# Altium PCB Pulser_10-2023.PcbDoc (part 1 of 2)
Units mm, origin at the board's own origin, x right, y up, seen from the top; angles counter-clockwise.
Board outline 57.93 x 43.58 mm, 4 copper layers (Top Layer, Int1 (GND), Int2 (Power), Bottom Layer), stack 1.56 mm thick; 123 components, 91 nets, 416 pads, 251 vias.
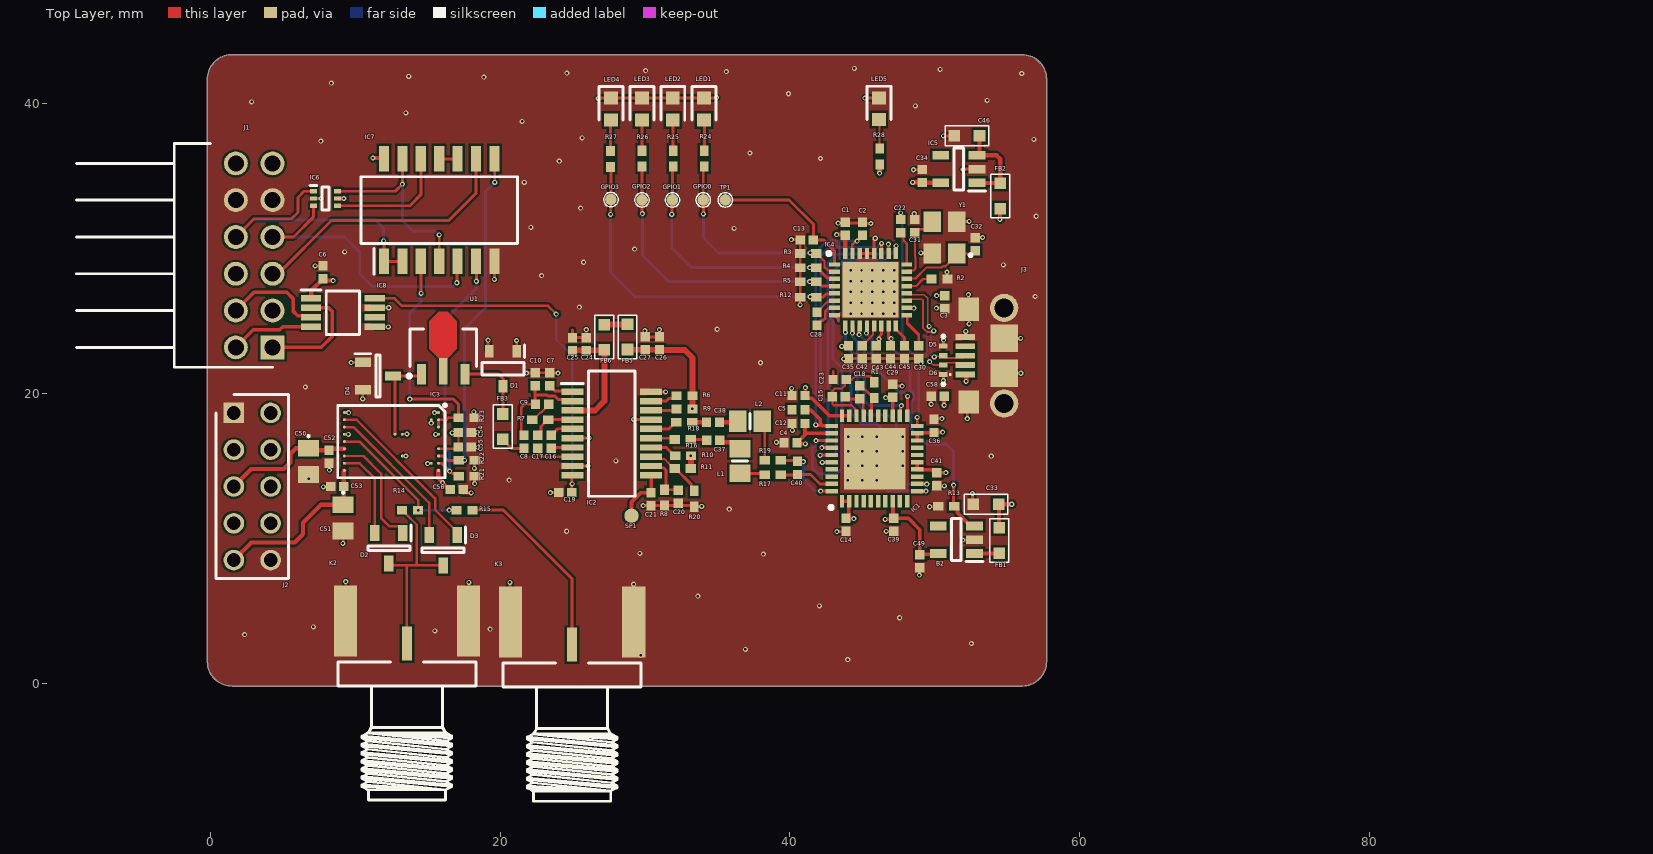
[diagram p0: Top Layer view]
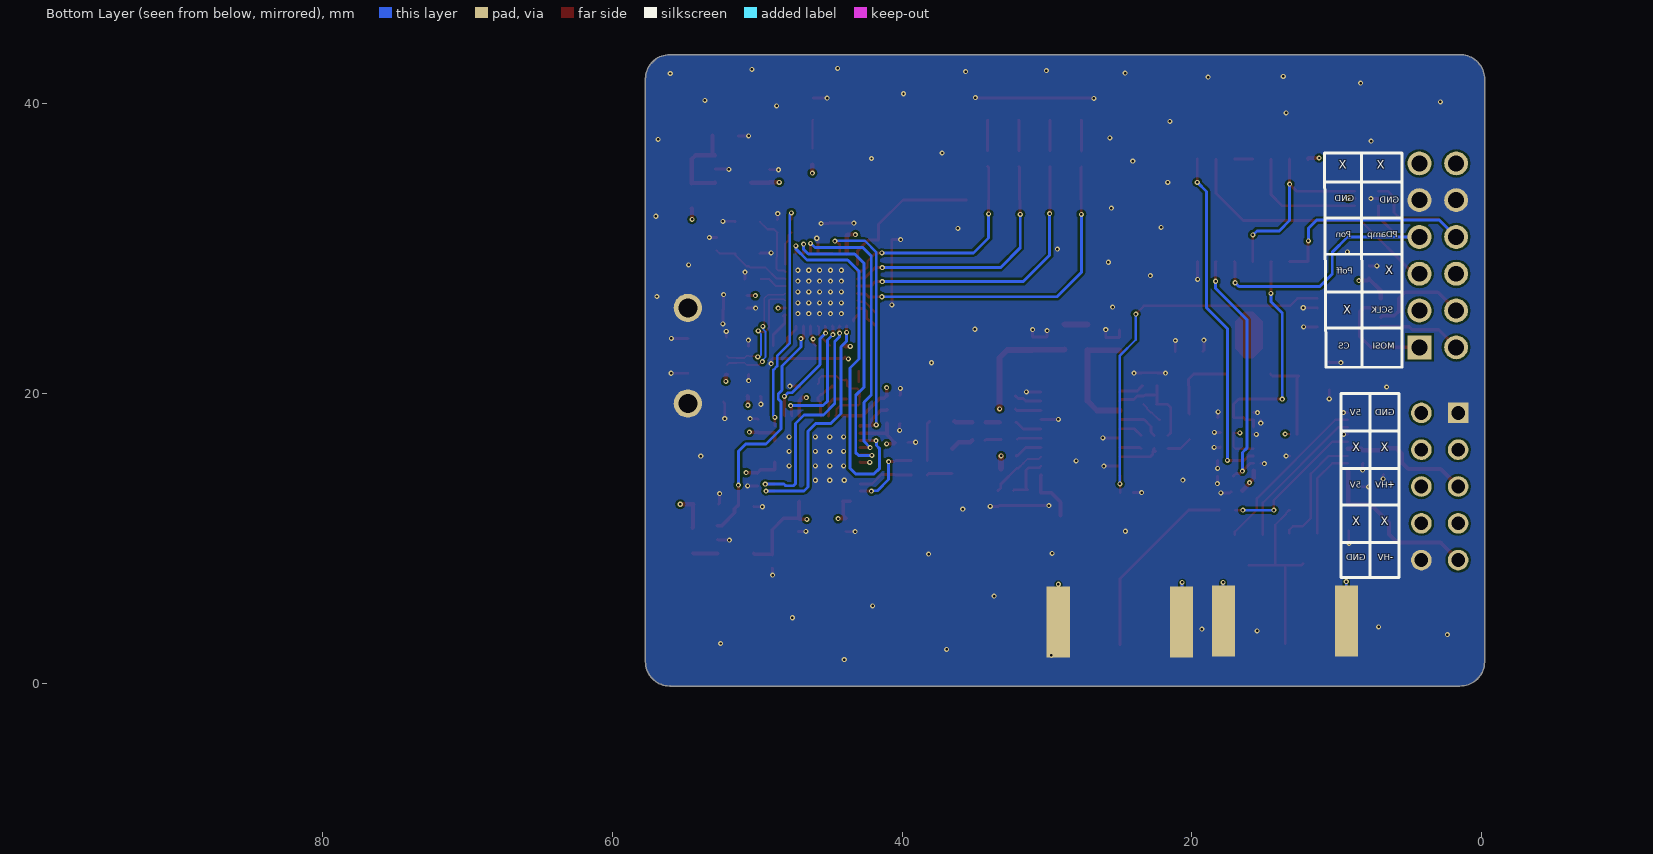
[diagram p1: Bottom Layer view, seen from below]
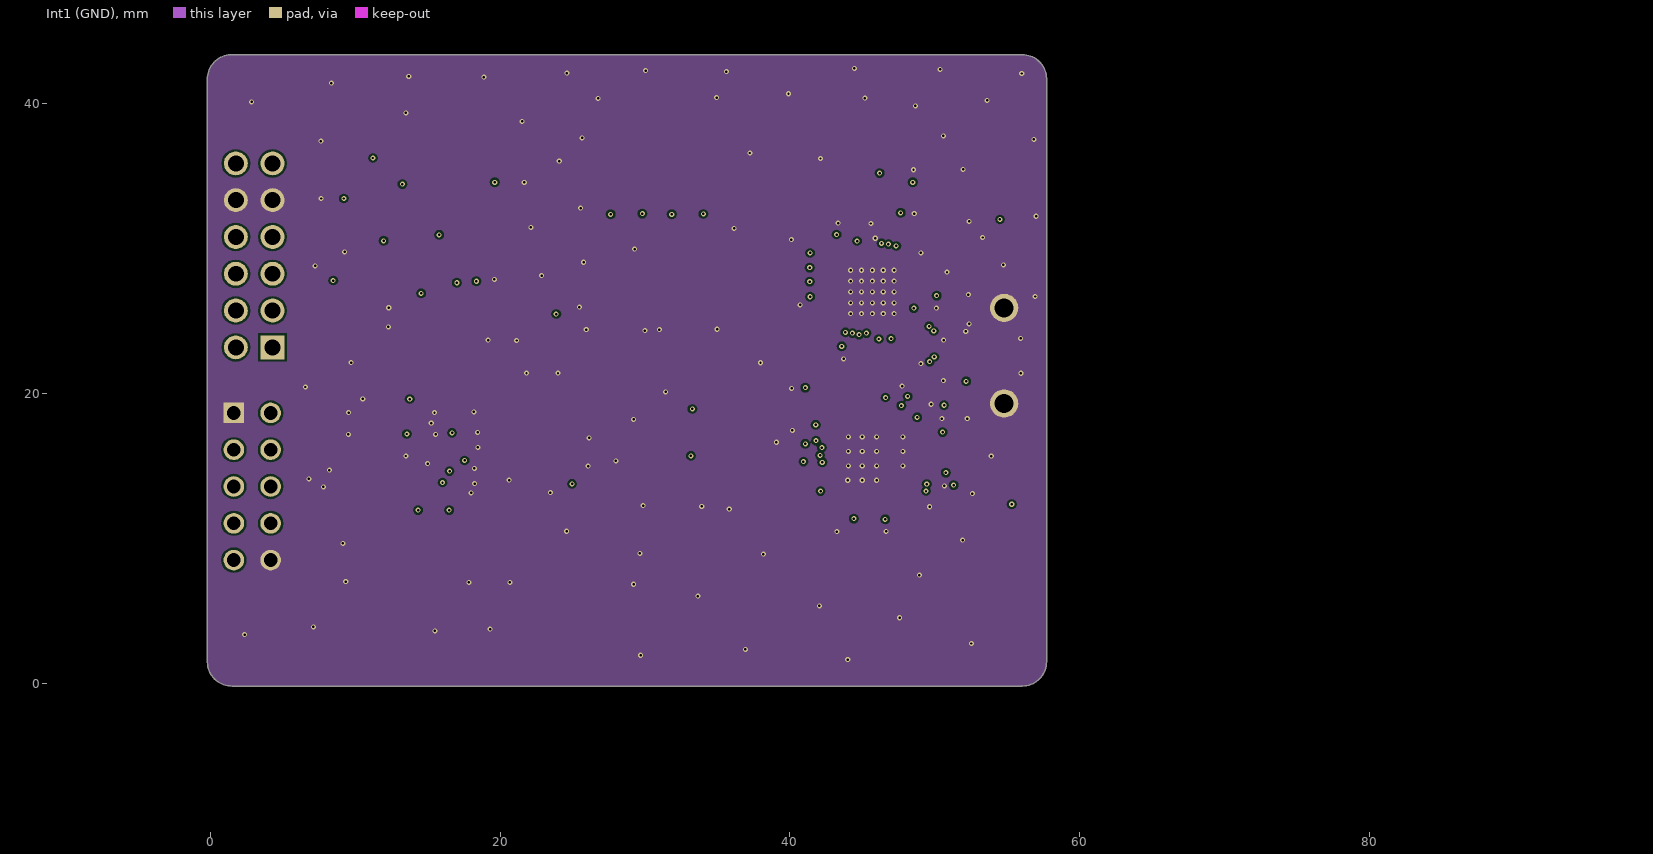
[diagram p2: Int1 (GND)]
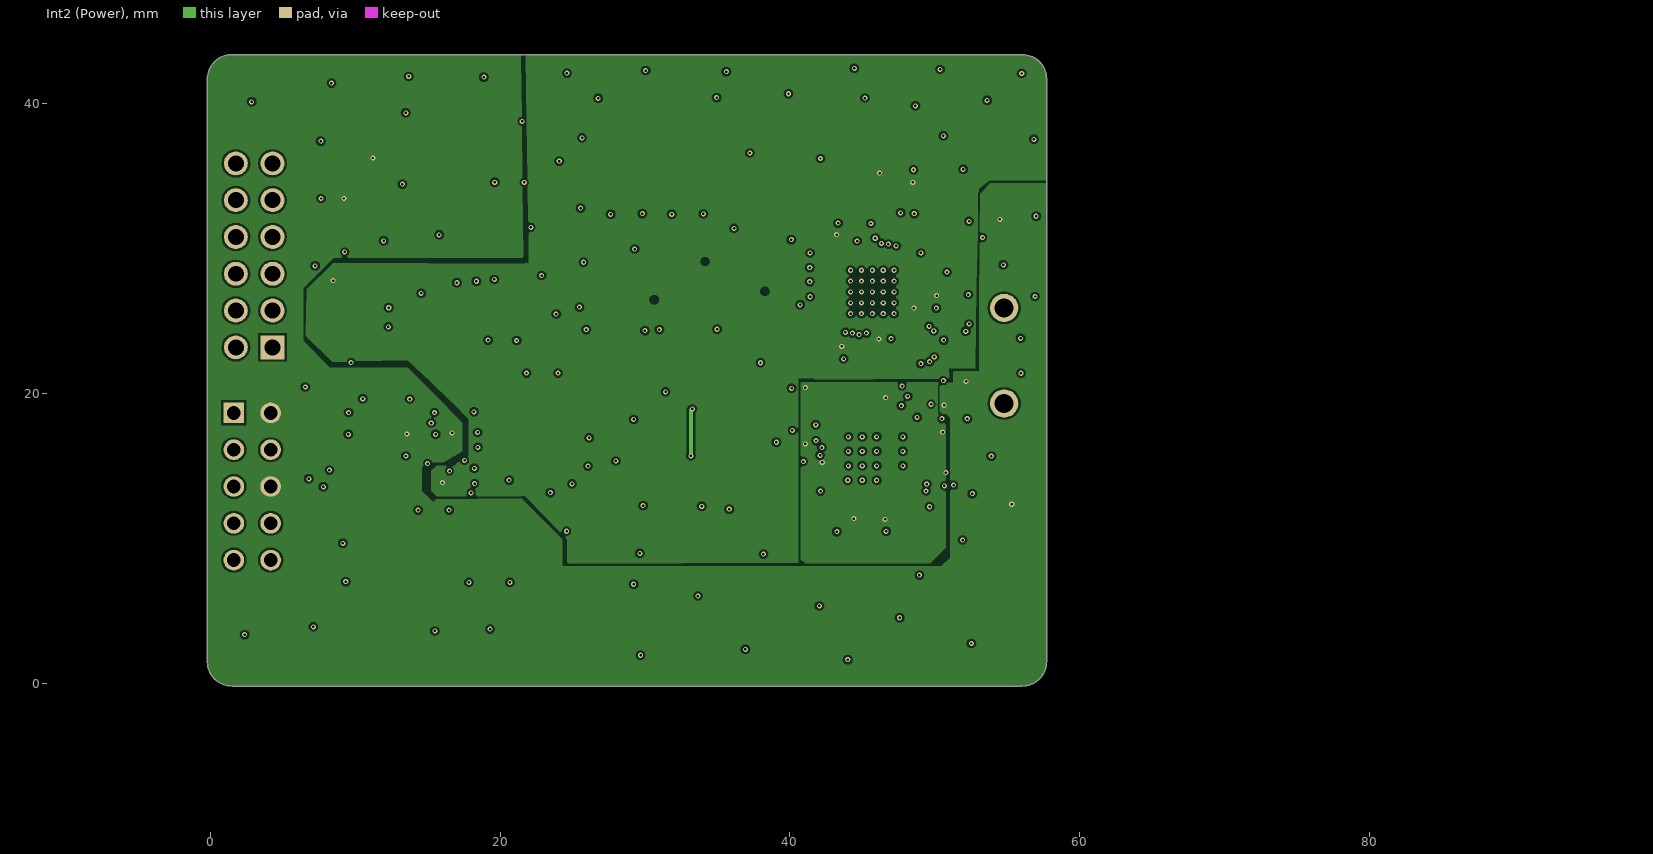
[diagram p3: Int2 (Power)]
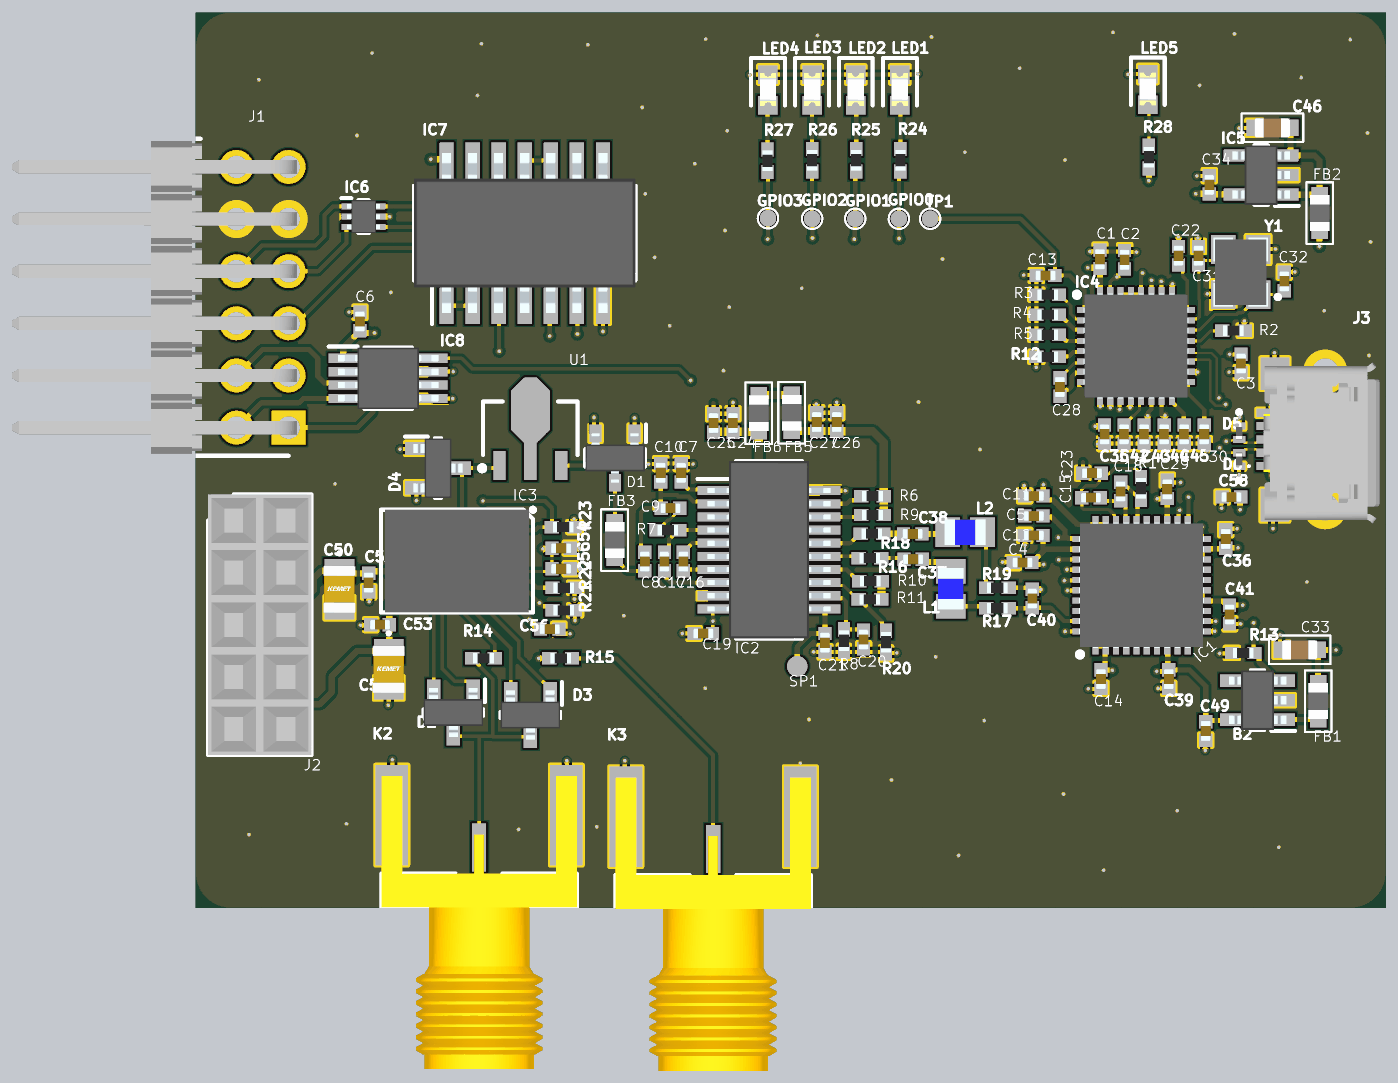
[diagram p5: 3D render of the assembled board from above, using the file's embedded part models]

## Layer stack, top to bottom
Top Solder: solder mask 0.0254, SM-001, Dk 4
Top Layer: signal copper 0.035
Dielectric 1: prepreg 0.11, PP-017, Dk 4.3
Int1 (GND): signal copper 0.035
Dielectric 3: core 1.2, Core-039, Dk 4.8
Int2 (Power): signal copper 0.035
Dielectric 5: prepreg 0.11, PP-017, Dk 4.3
Bottom Layer: signal copper 0.035
Bottom Solder: solder mask 0.0254, SM-001, Dk 4

## Board outline
-0.2,1.446 cw(c1.475,1.475) -0.2,1.447 -0.2,1.446 ccw(c1.475,1.475) 1.501,-0.2 ccw(c1.475,1.475) 1.503,-0.2 1.501,-0.2 56,-0.2 ccw(c56,0) 56.037,-0.197 ccw(c56.075,0) 56.078,-0.2 ccw(c56.05,1.475) 57.726,1.475 ccw(c56.05,1.475) 57.725,1.502 57.725,41.725 ccw(c57.525,41.725) 57.725,41.728 ccw(c56.05,41.7) 56.044,43.376 ccw(c56,43.18) 56,43.38 1.45,43.38 ccw(c1.45,43.18) 1.399,43.374 ccw(c1.475,41.7) -0.2,41.674 -0.2,1.45 ccw(c0,1.45)

## Design rules (kind name [scope] priority, off if disabled: settings)
Clearance [All] p1: gap=0.15 ignorepadtopadclearanceinfootprint=TRUE
ComponentClearance [All] p1: gap=0 collisioncheckmode=3 verticalgap=0 showdistances=FALSE
DiffPairsRouting [All] p1: maxlimit=0.254 minlimit=0.2 mostfreqgap=0.2 toplayer_minwidth=0.1 toplayer_maxwidth=0.381 toplayer_prefwidth=0.12 midlayer1_minwidth=0.1 midlayer1_maxwidth=0.381 midlayer1_prefwidth=0.12 midlayer2_minwidth=0.1 midlayer2_maxwidth=0.381 midlayer2_prefwidth=0.12 bottomlayer_minwidth=0.1 bottomlayer_maxwidth=0.381 bottomlayer_prefwidth=0.12 maxuncoupledlength=12.7
PlaneConnect [All] p1: planeconnectstyle=Direct reliefexpansion=0.508 reliefentries=4 reliefconductorwidth=0.254 reliefairgap=0.254
PolygonConnect [All] p1: connectstyle=Direct reliefconductorwidth=0.254 reliefentries=4 polygonreliefangle="90 Angle" airgapwidth=0.254
RoutingVias [All] p1: holewidth=0.2 width=0.4 viastyle="Through Hole" minholewidth=0.15 minwidth=0.3 maxholewidth=0.4 maxwidth=0.8
SilkToSilkClearance [All] p1: silktosilkclearance=0
SolderMaskExpansion [All] p1: expansion=0.102
UnRoutedNet [All] p1: checkbadconnections=TRUE
Width [All] p1: maxlimit=0.4 minlimit=0.15 preferedwidth=0.2
25 further rules are at their usual default settings.

## Classes and differential pairs
net class 50Ohm: NetD2_1 NetD2_2 NetD2_3 NetD3_1 NetD3_2
component class "MSI001 & MSI2500 ": B2 C1 C2 C4 C5 C11 C12 C13 C14 C15 C18 C22 C23 C28 C29 C30 C31 C32 C33 C34 C35 C36 C37 C38 C39 C40 C41 C42 C43 C44 C45 C46 C49 C58 D5 D6 FB1 FB2 GPIO0 GPIO1 GPIO2 GPIO3 IC1 IC4 IC5 J3 L1 L2 LED1 LED2 LED3 LED4 LED5 R1 R2 R3 R4 R5 R12 R13 R16 R17 R18 R19 R24 R25 R26 R27 R28 TP1 Y1
component class "Pulser & AD8331": C3 C6 C7 C8 C9 C10 C16 C17 C19 C20 C21 C24 C25 C26 C27 C50 C51 C52 C53 C54 C55 C56 D1 D2 D3 D4 FB3 FB5 FB6 IC2 IC3 IC6 IC7 IC8 J1 J2 K2 K3 R6 R7 R8 R9 R10 R11 R14 R15 R20 R21 R22 R23 SP1 U1
differential pair USB: +USB_P -USB_N

## Components (designator, comment, footprint, x,y, rotation, side; value= is the part's Value field where it differs from the comment)
B2 "MIC5504-2.8YM5-TR" SOT95P280X145-5N 51.5,9.9 r180 top
C1 "cap0603" 0402_C 43.825,31.375 r270 top value=10u/10V
C2 "cap0603" 0402_C 45.025,31.35 r270 top value=10u/10V
C3 "cap0603" 0402_C 50.7,26.3 r270 top value=10u/10V
C4 "cap0603" 0402_C 40.05,16.6 r180 top value=1u/10V
C5 "cap0402" 0402_C 40.6,18.875 r180 top value=10nf
C6 "cap0402" 0402_C 7.775,28.35 r90 top value=100n
C7 "cap0402" 0402_C 23.425,20.975 r270 top value=100n
C8 "cap0402" 0402_C 21.65,16.65 r90 top value=100n
C9 "cap0402" 0402_C 22.9,19.25 r180 top value=18n
C10 "cap0402" 0402_C 22.425,20.975 r270 top value=22pF
C11 "cap0402" 0402_C 40.6,19.85 r180 top value=10nf
C12 "cap0402" 0402_C 40.6,17.925 r180 top value=10nf
C13 "cap0603" 0402_C 41.173,30.582 r0 top value=1u
C14 "cap0402" 0402_C 43.875,10.925 r90 top value=10nf
C15 "cap0402" 0402_C 43.383,19.761 r180 top value=6800pf
C16 "cap0402" 0402_C 23.525,16.65 r90 top value=100n
C17 "cap0402" 0402_C 22.6,16.65 r90 top value=100n
C18 "cap0402" 0402_C 44.831,20.066 r270 top value=33nf
C19 "cap0402" 0402_C 24.5,13.15 r0 top value=1n
C20 "cap0402" 0402_C 32.309,12.852 r90 top value=100n
C21 "cap0402" 0402_C 30.425,12.7 r270 top value=100n
C22 "cap0402" 0402_C 47.65,31.55 r270 top value=10nf
C23 "cap0402" 0402_C 43.434,20.955 r0 top value=10nf
C24 "cap0402" 0402_C 25.95,23.4 r270 top value=1nf
C25 "cap0402" 0402_C 25,23.4 r270 top value=100nf
C26 "cap0402" 0402_C 31,23.45 r270 top value=1nf
C27 "cap0402" 0402_C 30.025,23.45 r270 top value=100nf
C28 "cap0402" 0402_C 41.875,25.15 r90 top value=10nf
C29 "cap0402" 0402_C 47.1,20.17 r90 top value=10nf
C30 "cap0603" 0402_C 48.9,22.85 r270 top value=1u/10V
C31 "cap0402" 0402_C 48.625,31.55 r270 top value=18Pf
C32 "cap0402" 0402_C 52.8,30.3 r270 top value=18Pf
C33 "cap0603" "SM0603 _3D_cap" 53.55,12.35 r0 top value="1uF 16V"
C34 "cap0603" 0402_C 49.148,35.003 r90 top value="1uF 10V"
C35 "cap0603" 0402_C 44.05,22.85 r270 top value=10u/10V
C36 "cap0402" 0402_C 49.95,17.75 r270 top value=10nf
C37 "cap0402" 0402_C 34.722,16.764 r180 top value=100n
C38 "cap0402" 0402_C 34.7,18 r180 top value=100n
C39 "cap0402" 0402_C 47.175,10.925 r90 top value=10nf
C40 "cap0402" 0402_C 40.525,14.85 r90 top value=18pf
C41 "cap0402" 0402_C 50.14,14.072 r90 top value=10nf
C42 "cap0603" 0402_C 45,22.85 r270 top value=10u/10V
C43 "cap0603" 0402_C 45.975,22.85 r270 top value=10u/10V
C44 "cap0603" 0402_C 46.95,22.85 r270 top value=1u/10V
C45 "cap0603" 0402_C 47.925,22.85 r270 top value=1u/10V
C46 "cap0603" "SM0603 _3D_cap" 52.223,37.778 r0 top value="1uF 16V"
C49 "cap0603" 0402_C 48.975,8.4 r270 top value="1uF 10V"
C50 "cap0603" C0805 6.775,15.3 r270 top value="1u 100V"
C51 "cap0603" C0805 9.175,11.4 r270 top value="1u 100V"
C52 "cap0402" 0402_C 8.2,15.625 r90 top value="100n 100V"
C53 "cap0402" 0402_C 8.75,13.575 r0 top value="100n 100V"
C54 "cap0402" 0402_C 17.575,17.3 r0 top value="100n 10V"
C55 "cap0402" 0402_C 17.575,16.3 r0 top value="100n 10V"
C56 "cap0402" 0402_C 17.018,13.36 r0 top value="100n 10V"
C58 "cap0402" 0402_C 50.225,19.8 r0 top value=100nf
D1 "BAV99-7-F" SOT95P240X120-3N 20.2,21.7 r270 top
D2 "MMBD7000HS-7-F" SOT96P240X110-3N_ 12.325,9.3 r270 top
D3 "MMBD7000HS-7-F" SOT96P240X110-3N_ 16.075,9.175 r270 top
D4 "MMBD7000HS-7-F" SOT96P240X110-3N_ 11.575,21.2 r0 top
D5 "ESD101B102ELSE6327XTSA1" ESD207B102ELE6327 50.6,22.925 r180 top
D6 "ESD101B102ELSE6327XTSA1" ESD207B102ELE6327 50.6,21.625 r0 top
FB1 "75R@100MHz" SM0603_3D_res 54.45,9.85 r270 top
FB2 "75R@100MHz" SM0603_3D_res 54.523,33.628 r90 top
FB3 "75R@100MHz" SM0603_3D_res 20.175,17.7 r270 top
FB5 "75R@100MHz" SM0603_3D_res 28.8,23.9 r90 top
FB6 "75R@100MHz" SM0603_3D_res 27.2,23.875 r270 top
GPIO0 "TP" TP_1mm 34.025,33.35 r90 top (schematic designator TP2)
GPIO1 "TP" TP_1mm 31.9,33.35 r90 top (schematic designator TP3)
GPIO2 "TP" TP_1mm 29.8,33.35 r90 top (schematic designator TP4)
GPIO3 "TP" TP_1mm 27.65,33.375 r90 top (schematic designator TP5)
IC1 "MSI001" QFN50P600X600X90-41N-D 45.85,15.5 r90 top
IC2 "AD8331ARQZ" SOP64P600X175-20N 27.7,17.225 r0 top
IC3 "HV7361GA-G" BGA22C50P9X14_500X700X105 12.5,16.675 r270 top
IC4 "MSI2500" QFN50P500X500X90-33N-D 45.575,27.15 r0 top
IC5 "TPS7A2033PDBVR" SOT95P280X145-5N 51.673,35.478 r180 top
IC6 "SN74LVC2G04DRLR" SOTFL50P160X60-6N 7.95,33.452 r0 top
IC7 "TC74VHC08F_EL,K,F_" SOIC127P780X190-14N_ 15.8,32.65 r90 top
IC8 "MCP4812-E_MS" SOP65P490X110-8N 9.15,25.575 r0 top
J1 "90122-0126" HDRRA12W65P254_2X6_1516X250X615P 4.3,23.175 r90 top
J2 "534998-5" RHDR10W77P254X254_2X5_1270X503X635P 1.625,18.65 r270 top
J3 "10118193-0001LF" 101181930001LF 54.725,22.6 r90 top
K2 "SMA_Edge" AMPHENOL_132357-11 13.575,2.725 r90 top
K3 "SMA_Edge" AMPHENOL_132357-11 24.975,2.65 r90 top
L1 "AIML-0805HC-1R5M-T" INDC2012X95N 36.55,15.325 r270 top
L2 "AIML-0805HC-1R5M-T" INDC2012X95N 37.25,18.075 r0 top
LED1 "LTST-C190GKT" LEDC1608X90N 34.075,39.625 r270 top
LED2 "LTST-C190GKT" LEDC1608X90N 31.925,39.625 r270 top
LED3 "LTST-C190GKT" LEDC1608X90N 29.8,39.625 r270 top
LED4 "LTST-C190GKT" LEDC1608X90N 27.65,39.625 r270 top
LED5 "LTST-C190GKT" LEDC1608X90N 46.15,39.65 r270 top
R1 "390" 0402_R 45.822,20.218 r270 top value=280
R2 "510R" 0402_R 50.325,27.9 r180 top value=280
R3 "10K" 0402_R 41.275,29.65 r180 top value=10k
R4 "10k" 0402_R 41.275,28.675 r180 top
R5 "10k" 0402_R 41.275,27.7 r0 top
R6 "10k" 0402_R 32.741,19.837 r180 top
R7 "280" 0402_R 22.775,18.175 r180 top
R8 "12k" 0402_R 31.35,12.8 r270 top
R9 "10k" 0402_R 32.741,18.923 r180 top
R10 "10k" 0402_R 32.639,15.697 r180 top
R11 "10k" 0402_R 32.614,14.808 r180 top
R12 "10k" 0402_R 41.275,26.625 r180 top
R13 "10k" 0402_R 50.8,12.2 r180 top
R14 "0R" 0402_R 13.792,11.938 r0 top value=4k7
R15 "0R" 0402_R 17.551,11.938 r0 top value=4k7
R16 "84.5R" 0402_R 32.614,16.815 r0 top value=10k
R17 "158R" 0402_R 38.825,14.375 r0 top value=18R
R18 "84.5R" 0402_R 32.715,18.009 r0 top value=10k
R19 "158R" 0402_R 38.825,15.375 r0 top value=18R
R20 "10k" 0402_R 33.4,12.725 r270 top
R21 "10k" 0402_R 17.7,14.275 r0 top
R22 "10k" 0402_R 17.7,15.375 r0 top
R23 "10k" 0402_R 17.675,18.325 r0 top
R24 "470R" 0402_R 34.1,36.2 r90 top value=10k
R25 "470R" 0402_R 31.95,36.2 r90 top value=10k
R26 "470R" 0402_R 29.8,36.2 r90 top value=10k
R27 "470R" 0402_R 27.625,36.175 r90 top value=10k
R28 "470R" 0402_R 46.2,36.35 r90 top value=10k
SP1 "SolderPad D1mm_round" "SolderPad_D1mm _round" 29.075,11.55 r270 top value="\"VCM\""
TP1 "TP" TP_1mm 35.55,33.35 r90 top
U1 "T/R switch" SOT89-150P409X160-3N 16.075,23.125 r90 top
Y1 "ABM8G-24.000MHZ-18-D2Y-T" ABM8G 50.675,30.75 r90 top

## Footprints (in the part's own frame and the unit in brackets; to place one, negate y for a bottom-side part, rotate by r counter-clockwise, add the part's x,y. Pads: shape width x height; smd on the part's side, far side on the other; paste and mask are expansions set on the pad)
0402_C [mm]
  rect 0.65x0.64 smd: 1(-0.45,0) 2(0.45,0)
  body extent -0.5,-0.25 0.5,0.25, height 0.56
0402_R [mm]
  rect 0.7x0.6 smd: 1(-0.55,0) 2(0.55,0)
  body extent -0.5,-0.25 0.5,0.25, height 0.35
101181930001LF [mm]
  rect 0.4x1.35 smd: 1(-1.3,2.605) 2(-0.65,2.605) 3(0,2.605) 4(0.65,2.605) 5(1.3,2.605)
  round 1.95 hole 1.3: MH1(-3.3,-0.07) MH2(3.3,-0.07)
  rect 1.6x1.4 smd: MP1(-3.2,2.38) MP2(3.2,2.38)
  rect 1.9x1.9 smd: MP3(-1.2,-0.07) MP4(1.2,-0.07)
  silkscreen extent -1.35,3.6 -1.25,3.7, body extent -4.1,-2.73 3.76,2.93, height 2.81
ABM8G [mm]
  rect 1.4x1.2 smd: 1(-1.1,-0.85) 2(1.1,-0.85) 3(1.1,0.85) 4(-1.1,0.85)
  silkscreen extent -1.29,-1.89 -1.14,-1.73, body extent -1.68,-1.33 1.68,1.33, height 1.1
AMPHENOL_132357-11 [mm]
  rect 2.35x0.7 smd: 1(0,0)
  rect 4.9x1.6 smd: 2(1.575,4.25) 2(1.575,-4.25)
  rect 4.9x1.6 smd far side: 2(1.575,4.25) 2(1.575,-4.25)
  silkscreen extent -10.81,-4.76 -1.28,4.76, body extent -10.8,-4.76 3.48,4.76, height 4.08
BGA22C50P9X14_500X700X105 [mm]
  round 0.2 smd: A1(-2,3.25) A2(-1.5,3.25) A3(-1,3.25) A4(-0.5,3.25) A6(0.5,3.25) A7(1,3.25) A8(1.5,3.25) A9(2,3.25) B2(-1.5,2.75) B8(1.5,2.75) F4(-0.5,0.75) F7(1,0.75) G4(-0.5,0.25) P1(-2,-3.25) P2(-1.5,-3.25) P3(-1,-3.25) P4(-0.5,-3.25) P5(0,-3.25) P6(0.5,-3.25) P7(1,-3.25) P8(1.5,-3.25) P9(2,-3.25)
  silkscreen extent -2.6,-3.7 2.5,3.8, body extent -2.5,-3.5 2.5,3.5, height 1.05
C0805 [mm]
  rect 1.15x1.45 smd: 1(-0.9,0) 2(0.9,0)
  silkscreen extent -1.8,-0.05 -1.7,0.05, body extent -1.15,-0.78 1.15,0.77, height 0.98
ESD207B102ELE6327 [mm]
  rect 0.6x0.35 smd: 1(0,-0.33) 2(0,0.33)
  silkscreen extent -0.1,-1.1 0.1,-0.9, body extent -0.16,-0.29 0.16,0.33, height 0.32
HDRRA12W65P254_2X6_1516X250X615P [mm]
  rect 1.65x1.65 hole 1.1: 1(0,0)
  round 1.65 hole 1.1: 2(0,2.54) 3(2.54,0) 4(2.54,2.54) 5(5.08,0) 6(5.08,2.54) 7(7.62,0) 8(7.62,2.54) 9(10.16,0) 10(10.16,2.54) 11(12.7,0) 12(12.7,2.54)
  silkscreen extent -1.37,0 14.07,13.54, body extent -1.27,-0.4 13.97,13.47, height 6.16
INDC2012X95N [mm]
  rect 1.2x1.45 smd: 1(-0.85,0) 2(0.85,0)
  silkscreen extent 0,-0.53 0,0.53, body extent -1,-0.63 1,0.63, height 0.95
LEDC1608X90N [mm]
  rect 0.9x0.95 smd: 1(-0.75,0) 2(0.75,0)
  silkscreen extent -1.55,-0.82 0.75,0.82, body extent -0.82,-0.4 0.78,0.4, height 0.8
QFN50P500X500X90-33N-D [mm]
  rect 0.75x0.3 smd: 1(-2.5,1.75) 2(-2.5,1.25) 3(-2.5,0.75) 4(-2.5,0.25) 5(-2.5,-0.25) 6(-2.5,-0.75) 7(-2.5,-1.25) 8(-2.5,-1.75) 17(2.5,-1.75) 18(2.5,-1.25) 19(2.5,-0.75) 20(2.5,-0.25) 21(2.5,0.25) 22(2.5,0.75) 23(2.5,1.25) 24(2.5,1.75)
  rect 0.3x0.75 smd: 9(-1.75,-2.5) 10(-1.25,-2.5) 11(-0.75,-2.5) 12(-0.25,-2.5) 13(0.25,-2.5) 14(0.75,-2.5) 15(1.25,-2.5) 16(1.75,-2.5) 25(1.75,2.5) 26(1.25,2.5) 27(0.75,2.5) 28(0.25,2.5) 29(-0.25,2.5) 30(-0.75,2.5) 31(-1.25,2.5) 32(-1.75,2.5)
  rect 3.85x3.85 smd: 33(0,0)
  silkscreen extent -3,2.38 -2.75,2.62, body extent -2.55,-2.55 2.55,2.55, height 0.9
QFN50P600X600X90-41N-D [mm]
  rect 0.85x0.3 smd: 1(-2.95,2.25) 2(-2.95,1.75) 3(-2.95,1.25) 4(-2.95,0.75) 5(-2.95,0.25) 6(-2.95,-0.25) 7(-2.95,-0.75) 8(-2.95,-1.25) 9(-2.95,-1.75) 10(-2.95,-2.25) 21(2.95,-2.25) 22(2.95,-1.75) 23(2.95,-1.25) 24(2.95,-0.75) 25(2.95,-0.25) 26(2.95,0.25) 27(2.95,0.75) 28(2.95,1.25) 29(2.95,1.75) 30(2.95,2.25)
  rect 0.3x0.85 smd: 11(-2.25,-2.95) 12(-1.75,-2.95) 13(-1.25,-2.95) 14(-0.75,-2.95) 15(-0.25,-2.95) 16(0.25,-2.95) 17(0.75,-2.95) 18(1.25,-2.95) 19(1.75,-2.95) 20(2.25,-2.95) 31(2.25,2.95) 32(1.75,2.95) 33(1.25,2.95) 34(0.75,2.95) 35(0.25,2.95) 36(-0.25,2.95) 37(-0.75,2.95) 38(-1.25,2.95) 39(-1.75,2.95) 40(-2.25,2.95)
  rect 4.25x4.25 smd: 41(0,0)
  silkscreen extent -3.5,2.87 -3.25,3.12, body extent -3.05,-3.05 3.05,3.05, height 0.9
RHDR10W77P254X254_2X5_1270X503X635P [mm]
  rect 1.425x1.425 hole 0.95: 1(0,0)
  round 1.425 hole 0.95: 2(0,2.54) 3(2.54,0) 4(2.54,2.54) 5(5.08,0) 6(5.08,2.54) 7(7.62,0) 8(7.62,2.54) 9(10.16,0) 10(10.16,2.54)
  silkscreen extent -1.27,-1.24 11.43,3.78, body extent -1.27,-1.24 11.43,3.78, height 6.72
"SM0603 _3D_cap" [mm]
  rect 0.8x0.8 smd: 1(-0.875,0) 2(0.875,0)
  silkscreen extent -1.5,-0.7 1.5,0.7, body extent -0.87,-0.47 0.88,0.48, height 0.87
SM0603_3D_res [mm]
  rect 0.8x0.8 smd: 1(-0.875,0) 2(0.875,0)
  silkscreen extent -1.5,-0.65 1.5,0.65, body extent -0.87,-0.47 0.88,0.48, height 0.55
SOIC127P780X190-14N_ [mm]
  rect 1.775x0.7 smd: 1(-3.538,3.81) 2(-3.538,2.54) 3(-3.538,1.27) 4(-3.538,0) 5(-3.538,-1.27) 6(-3.538,-2.54) 7(-3.538,-3.81) 8(3.538,-3.81) 9(3.538,-2.54) 10(3.538,-1.27) 11(3.538,0) 12(3.538,1.27) 13(3.538,2.54) 14(3.538,3.81)
  silkscreen extent -4.43,-5.4 2.3,5.4, body extent -3.9,-5.4 3.9,5.4, height 1.9
"SolderPad_D1mm _round" [mm]
  round 1 smd: 1(0,0)
SOP64P600X175-20N [mm]
  rect 1.52x0.44 smd: 1(-2.715,2.88) 2(-2.715,2.24) 3(-2.715,1.6) 4(-2.715,0.96) 5(-2.715,0.32) 6(-2.715,-0.32) 7(-2.715,-0.96) 8(-2.715,-1.6) 9(-2.715,-2.24) 10(-2.715,-2.88) 11(2.715,-2.88) 12(2.715,-2.24) 13(2.715,-1.6) 14(2.715,-0.96) 15(2.715,-0.32) 16(2.715,0.32) 17(2.715,0.96) 18(2.715,1.6) 19(2.715,2.24) 20(2.715,2.88)
  silkscreen extent -3.47,-4.33 1.61,4.33, body extent -3,-4.33 3,4.33, height 1.75
SOP65P490X110-8N [mm]
  rect 1.4x0.45 smd: 1(-2.2,0.975) 2(-2.2,0.325) 3(-2.2,-0.325) 4(-2.2,-0.975) 5(2.2,-0.975) 6(2.2,-0.325) 7(2.2,0.325) 8(2.2,0.975)
  silkscreen extent -2.9,-1.5 1.15,1.55, body extent -2.45,-1.5 2.45,1.5, height 1.1
SOT89-150P409X160-3N [mm]
  rect 1.4x0.6 smd: 1(-1.8,1.5) 3(-1.8,-1.5)
  rect 1.8x0.6 smd: 2(-1.6,0)
  Top Layer region: -0.7,0.3 -0.05,0.95 1.85,0.95 2.5,0.3 2.5,-0.3 1.85,-0.95 -0.05,-0.95 -0.7,-0.3
  silkscreen extent -2.05,-2.3 1.32,2.47, body extent -1.28,-2.3 1.32,2.3, height 1.6
SOT95P240X120-3N [mm]
  rect 0.85x0.6 smd: 1(-1.2,0.95) 2(-1.2,-0.95) 3(1.2,0)
  silkscreen extent -1.63,-1.45 0.43,1.5, body extent -1.2,-1.45 1.2,1.45, height 1.2
SOT95P280X145-5N [mm]
  rect 1.15x0.6 smd: 1(-1.25,0.95) 2(-1.25,0) 3(-1.25,-0.95) 4(1.25,-0.95) 5(1.25,0.95)
  silkscreen extent -1.83,-1.45 0.33,1.5, body extent -1.4,-1.45 1.4,1.45, height 1.45
SOT96P240X110-3N_ [mm]
  rect 1.1x0.65 smd: 1(-1.05,0.96) 2(-1.05,-0.96) 3(1.05,0)
  silkscreen extent -1.6,-1.45 0.15,1.54, body extent -1.2,-1.45 1.2,1.45, height 1.1
SOTFL50P160X60-6N [mm]
  rect 0.475x0.3 smd: 1(-0.838,0.5) 2(-0.838,0) 3(-0.838,-0.5) 4(0.838,-0.5) 5(0.838,0) 6(0.838,0.5)
  silkscreen extent -1.07,-0.8 0.25,0.9, body extent -0.8,-0.8 0.8,0.8, height 0.6
TP_1mm [mm]
  round 0.8 smd: 1(0,0)
  silkscreen extent -0.5,-0.5 0.5,0.5

## Part data
B2: "MICROCHIP - MIC5504-2.8YM5-TR - LDO VOLT REG, 0.3A, 2.8V, SOT-23-5", Manufacturer_Name=Microchip, Mouser Part Number=998-MIC5504-2.8YM5TR, Arrow Part Number=MIC5504-2.8YM5-TR, Arrow Price/Stock=https://www.arrow.com/en/products/mic5504-2.8ym5-tr/microchip-technology?region=nac, Datasheet Link=https://datasheet.datasheetarchive.com/originals/distributors/DKDS-15/280852.pdf, Geometry.Height=1.45mm, Manufacturer_Part_Number=MIC5504-2.8YM5-TR, Mouser Price/Stock=https://www.mouser.co.uk/ProductDetail/Microchip-Technology/MIC5504-2.8YM5-TR?qs=U6T8BxXiZAXJ2TbsJS3NiQ%3D%3D
C1 C2 C3 C4 C13 C30 C33 C34 C35 C42 C43 C44 C45 C46 C49 C50 C51: "Capacitor  0603 inch", LatestRevisionDate=17-Jul-2002, LatestRevisionNote="Re-released for DXP Platform.", PackageDescription="Radial Cap, Thru-Hole; 2 Leads; 0.3 in Pin Spacing", PackageReference=RAD-0.3, Published=8-Jun-2000, Publisher="Altium Limited"
C5 C6 C7 C8 C9 C10 C11 C12 C14 C15 C16 C17 C18 C19 C20 C21 C22 C23 C25 C27 C28 C29 C31 C32 C36 C37 C38 C39 C40 C41 C52 C53 C54 C55 C56 C58: library part cap0603, "Capacitor  0402 inch", LatestRevisionDate=17-Jul-2002, LatestRevisionNote="Re-released for DXP Platform.", PackageDescription="Radial Cap, Thru-Hole; 2 Leads; 0.3 in Pin Spacing", PackageReference=RAD-0.3, Published=8-Jun-2000, Publisher="Altium Limited"
C24 C26: library part cap0603, "Capacitor  0603 inch", LatestRevisionDate=17-Jul-2002, LatestRevisionNote="Re-released for DXP Platform.", PackageDescription="Radial Cap, Thru-Hole; 2 Leads; 0.3 in Pin Spacing", PackageReference=RAD-0.3, Published=8-Jun-2000, Publisher="Altium Limited"
D1: "Diode", Manufacturer_Name="Diodes Inc.", Mouser Part Number=621-BAV99-F, Arrow Part Number=BAV99-7-F, Arrow Price/Stock=https://www.arrow.com/en/products/bav99-7-f/diodes-incorporated?region=nac, Datasheet Link=https://www.diodes.com/assets/Datasheets/ds12007.pdf, Height=1.2mm, Manufacturer_Part_Number=BAV99-7-F, Mouser Price/Stock=https://www.mouser.co.uk/ProductDetail/Diodes-Incorporated/BAV99-7-F?qs=E9Ihi8A05%252BSTVRjo74hQDA%3D%3D
D2 D3 D4: "Diode", Manufacturer_Name="Diodes Inc.", Mouser Part Number=621-MMBD7000HS-7-F, Arrow Part Number=MMBD7000HS-7-F, Arrow Price/Stock=https://www.arrow.com/en/products/mmbd7000hs-7-f/diodes-incorporated, Datasheet Link=https://www.diodes.com/assets/Datasheets/ds31782.pdf, Height=1.1mm, Manufacturer_Part_Number=MMBD7000HS-7-F, Mouser Price/Stock=https://www.mouser.co.uk/ProductDetail/Diodes-Incorporated/MMBD7000HS-7-F/?qs=4YT44p7w2bs7ic313M4gfA%3D%3D
D5 D6: "TVS Diode (Bi-directional)", Manufacturer_Name=Infineon, Mouser Part Number=726-ESD101B102ELSE63, Arrow Part Number=ESD101B102ELSE6327XTSA1, Arrow Price/Stock=https://www.arrow.com/en/products/esd101b102else6327xtsa1/infineon-technologies-ag?region=nac, Datasheet Link=https://www.infineon.com/dgdl/Infineon-ESD101_B1-DS-v01_04-EN.pdf?fileId=db3a30433e9d5d11013e9d6619a20002, Height=0mm, Manufacturer_Part_Number=ESD101B102ELSE6327XTSA1, Mouser Price/Stock=https://www.mouser.co.uk/ProductDetail/Infineon-Technologies/ESD101B102ELSE6327XTSA1?qs=wqPJ3MBjhrhYgaXAaMnHlw%3D%3D
FB1 FB2 FB3 FB5 FB6: "chip inductance 0603", Case=0805, Manufacturer=MURATA, Manufacturer Part Number=BLM21BB750SN1D, Part Number=IND0805_MURATA_BLM21BB750SN1D, Power=700mA, Resistance=0.16R, Tolerance=±25%, Author="S. Jafar", ComponentHeight=1.05mm, Component Type=Standard, CreateDate=12/21/2015, LatestRevisionDate=12/21/2015, Mounted=Yes, Part Description="SMD EMIFIL Suppression Chip Ferrite Bead", Pin Count=2, SMD=Yes, Socket=No, Status=None, Table="Inductors SMD"
GPIO0 GPIO1 GPIO2 GPIO3 TP1: library part "Test Point", "Connector", Manufacturer_Name=Oxley, Manufacturer_Part_Number=050/LT/B2, Datasheet Link=http://www.farnell.com/datasheets/2644146.pdf?_ga=2.63921641.795442872.1562935128-2061028581.1560430415, Height=4.5mm
IC1: "Integrated Circuit", Manufacturer_Name=MIRICS, Datasheet Link=http://sdr.lt/~hexx/MSi001_Datasheet_R3P3.pdf, Height=0.9mm, Manufacturer_Part_Number=MSI001
IC2: "Integrated Circuit", Manufacturer_Name="Analog Devices", Mouser Part Number=584-AD8331ARQZ, Arrow Part Number=AD8331ARQZ, Arrow Price/Stock=https://www.arrow.com/en/products/ad8331arqz/analog-devices, Datasheet Link=http://www.analog.com/static/imported-files/data_sheets/AD8331_8332_8334.pdf, Height=1.75mm, Manufacturer_Part_Number=AD8331ARQZ, Mouser Price/Stock=https://www.mouser.co.uk/ProductDetail/Analog-Devices/AD8331ARQZ?qs=%2FtpEQrCGXCwx0%2F22gf7ohQ%3D%3D
IC3: "Integrated Circuit", Manufacturer_Name=Microchip, Mouser Part Number=579-HV7361GA-G, Arrow Part Number=HV7361GA-G, Arrow Price/Stock=https://www.arrow.com/en/products/hv7361ga-g/microchip-technology, Datasheet Link=http://ww1.microchip.com/downloads/en/DeviceDoc/20005570C.pdf, Height=1.05mm, Manufacturer_Part_Number=HV7361GA-G, Mouser Price/Stock=https://www.mouser.co.uk/ProductDetail/Microchip-Technology/HV7361GA-G?qs=NoqMqJKvPFJ98Yl1cb744A%3D%3D
IC4: "Connector", Manufacturer_Name=MIRICS, Datasheet Link=http://sdr.lt/~hexx/MSi2500.pdf, Height=0.9mm, Manufacturer_Part_Number=MSI2500
IC5: library part TPS7A2050PDBVR, "Integrated Circuit", Manufacturer_Name="Texas Instruments", Mouser Part Number=595-TPS7A2050PDBVR, Arrow Part Number=TPS7A2050PDBVR, Arrow Price/Stock=https://www.arrow.com/en/products/tps7a2050pdbvr/texas-instruments?region=nac, Datasheet Link=https://www.ti.com/lit/gpn/tps7a20?HQS=ti-null-null-sf-df-pf-sep-wwe&DCM=yes, Height=1.45mm, Manufacturer_Part_Number=TPS7A2050PDBVR, Mouser Price/Stock=https://www.mouser.co.uk/ProductDetail/Texas-Instruments/TPS7A2050PDBVR?qs=hd1VzrDQEGgpoyZ%2F5FZYnQ%3D%3D
IC6: "Integrated Circuit", Manufacturer_Name="Texas Instruments", Mouser Part Number=595-SN74LVC2G04DRLR, Arrow Part Number=SN74LVC2G04DRLR, Arrow Price/Stock=https://www.arrow.com/en/products/sn74lvc2g04drlr/texas-instruments?region=nac, Datasheet Link=http://www.ti.com/lit/gpn/sn74lvc2g04, Height=0.6mm, Manufacturer_Part_Number=SN74LVC2G04DRLR, Mouser Price/Stock=https://www.mouser.co.uk/ProductDetail/Texas-Instruments/SN74LVC2G04DRLR?qs=pajgIaoyDUgGT9cUBVgEUw%3D%3D
IC7: "Hardware", Manufacturer_Name=Toshiba, Manufacturer_Part_Number=TC74VHC08F(EL,K,F), Mouser Part Number=757-TC74VHC08FELKF, Datasheet Link=https://componentsearchengine.com/Datasheets/1/TC74VHC08F(EL,K,F).pdf, Height=1.9mm, Mouser Price/Stock=https://www.mouser.co.uk/ProductDetail/Toshiba/TC74VHC08FELKF?qs=f0GatGUIxV0KIqTggGqR%252BQ%3D%3D
IC8: "Integrated Circuit", Arrow Part Number=MCP4812-E/MS, Manufacturer_Name=Microchip, Mouser Part Number=579-MCP4812-E/MS, Arrow Price/Stock=https://www.arrow.com/en/products/mcp4812-ems/microchip-technology, Datasheet Link=http://ww1.microchip.com/downloads/en/DeviceDoc/20002249B.pdf, Height=1.1mm, Manufacturer_Part_Number=MCP4812-E/MS, Mouser Price/Stock=https://www.mouser.co.uk/ProductDetail/Microchip-Technology/MCP4812-E-MS?qs=bxUt0k7cytJEpyWPtzKy6A%3D%3D
J1: "Connector", Manufacturer_Name=Molex, Mouser Part Number=538-90122-0126, Datasheet Link=https://componentsearchengine.com/Datasheets/2/90122-0126.pdf, Height=6.15mm, Manufacturer_Part_Number=90122-0126, Mouser Price/Stock=https://www.mouser.co.uk/ProductDetail/Molex/90122-0126?qs=PvP5v7Eimsm0iCqn6boA0w%3D%3D
J2: "Connector", Manufacturer_Name="TE Connectivity", Mouser Part Number=571-5349985, Arrow Part Number=534998-5, Arrow Price/Stock=https://www.arrow.com/en/products/534998-5/te-connectivity?region=nac, Datasheet Link=http://uk.rs-online.com/web/p/products/8638265, Height=6.35mm, Manufacturer_Part_Number=534998-5, Mouser Price/Stock=https://www.mouser.co.uk/ProductDetail/TE-Connectivity/534998-5?qs=X1mjqRbeMc7kAKePtTQuSw%3D%3D
J3: "Connector", Manufacturer_Name="Amphenol Communications Solutions", Mouser Part Number=649-10118193-0001LF, Arrow Part Number=10118193-0001LF, Arrow Price/Stock=https://www.arrow.com/en/products/10118193-0001lf/amphenol-fci?region=nac, Datasheet Link=https://cdn.amphenol-icc.com/media/wysiwyg/files/drawing/10118193.pdf, Height=3.3mm, Manufacturer_Part_Number=10118193-0001LF, Mouser Price/Stock=https://www.mouser.co.uk/ProductDetail/Amphenol-FCI/10118193-0001LF?qs=Ywefl8B65e63Nsqd%252B8HZaQ%3D%3D
L1 L2: "Inductor", Manufacturer_Name=ABRACON, Mouser Part Number=815-AIML-0805HC1R5MT, Arrow Part Number=AIML-0805HC-1R5M-T, Arrow Price/Stock=https://www.arrow.com/en/products/aiml-0805hc-1r5m-t/abracon?region=nac, Datasheet Link=https://abracon.com/Magnetics/inductors/AIML-0805HC.pdf, Height=0.95mm, Manufacturer_Part_Number=AIML-0805HC-1R5M-T, Mouser Price/Stock=https://www.mouser.co.uk/ProductDetail/ABRACON/AIML-0805HC-1R5M-T?qs=7Oetya%252B4D2Cpl0ykYwHcgg%3D%3D
LED1 LED2 LED3 LED4 LED5: "LED", Manufacturer_Name=Lite-On, Mouser Part Number=859-LTST-C190GKT, Arrow Part Number=LTST-C190GKT, Arrow Price/Stock=https://www.arrow.com/en/products/ltst-c190gkt/lite-on-technology?region=nac, Datasheet Link=https://media.digikey.com/pdf/Data%20Sheets/Lite-On%20PDFs/LTST-C190GKT.pdf, Height=0.9mm, Manufacturer_Part_Number=LTST-C190GKT, Mouser Price/Stock=https://www.mouser.co.uk/ProductDetail/Lite-On/LTST-C190GKT?qs=drxkyCeiWgbQzclgbojDOg%3D%3D
R1 R2: library part RC0402FR-0710KL, "RES 280 OHM 1/16W 0402 SMD", Package / Case="0402 (1005 Metric)", Power (Watts)="0.063W, 1/16W", Resistance (Ohms)=280, .Checked PCB=used, .Checked SCH=used, Category=Resistors, ComponentLink1Description=http://www.yageo.com/documents/recent/PYu-RC0402_51_RoHS_L_6.pdf, ComponentLink1URL=http://www.yageo.com/documents/recent/PYu-RC0402_51_RoHS_L_6.pdf, Height="0.016\" (0.40mm)", Size / Dimension="0.039\" L x 0.020\" W (1.00mm x 0.50mm)"
R3 R4 R5 R6 R9 R10 R11 R12 R13 R20 R21 R22 R23 R24 R25 R26 R27 R28: library part RC0402FR-0710KL, "RES 10K OHM 1/16W 1% 0402 SMD", Package / Case="0402 (1005 Metric)", Power (Watts)="0.063W, 1/16W", Resistance (Ohms)=280, .Checked PCB=used, .Checked SCH=used, Category=Resistors, ComponentLink1Description=http://www.yageo.com/documents/recent/PYu-RC0402_51_RoHS_L_6.pdf, ComponentLink1URL=http://www.yageo.com/documents/recent/PYu-RC0402_51_RoHS_L_6.pdf, Height="0.016\" (0.40mm)", Size / Dimension="0.039\" L x 0.020\" W (1.00mm x 0.50mm)"
R7: library part RC0402FR-0710KL, "RES 280 OHM 1/16W 0402 SMD", Package / Case="0402 (1005 Metric)", Power (Watts)="0.063W, 1/16W", .Checked PCB=used, .Checked SCH=used, Category=Resistors, ComponentLink1Description=http://www.yageo.com/documents/recent/PYu-RC0402_51_RoHS_L_6.pdf, ComponentLink1URL=http://www.yageo.com/documents/recent/PYu-RC0402_51_RoHS_L_6.pdf, Height="0.016\" (0.40mm)", Resistance (Ohms)=280, Size / Dimension="0.039\" L x 0.020\" W (1.00mm x 0.50mm)"
R8: library part RC0402FR-0710KL, "RES 12K OHM 1/16W 0402 SMD", Package / Case="0402 (1005 Metric)", Power (Watts)="0.063W, 1/16W", .Checked PCB=used, .Checked SCH=used, Category=Resistors, ComponentLink1Description=http://www.yageo.com/documents/recent/PYu-RC0402_51_RoHS_L_6.pdf, ComponentLink1URL=http://www.yageo.com/documents/recent/PYu-RC0402_51_RoHS_L_6.pdf, Height="0.016\" (0.40mm)", Size / Dimension="0.039\" L x 0.020\" W (1.00mm x 0.50mm)"
R14 R15: "Res_0402_EU", Case=1206, Manufacturer=GENERIC, Manufacturer1 ComponentHeight=0.65mm, Manufacturer1 Example="NIC COMPONENT", Manufacturer1 Part Number=NRC12F4701TRF, Manufacturer Part Number=R1206_4K7_1%_0.25W_100PPM, Power=0.25W, Tolerance=±1%, Author="CERN DEM JLC", Component Type=Standard, CreateDate=12/3/2007, HelpURL=\\cern.ch\dfs\Applications\Altium\Datasheets\R1206_NIC_NRC.pdf, LatestRevisionDate=3/13/2008, Mounted=Yes, Part Description="General Purpose Thick Film Chip Resistor", Part Number=R1206_4K7_1%_0.25W_100PPM, Pin Count=2, SMD=Yes, Socket=No, Status=Preferred, Table="Resistors SMD", TC=±100ppm/°C
R16 R18: library part RC0402FR-0710KL, "RES 10K OHM 1/16W 0402 SMD", Package / Case="0402 (1005 Metric)", Power (Watts)="0.063W, 1/16W", .Checked PCB=used, .Checked SCH=used, Category=Resistors, ComponentLink1Description=http://www.yageo.com/documents/recent/PYu-RC0402_51_RoHS_L_6.pdf, ComponentLink1URL=http://www.yageo.com/documents/recent/PYu-RC0402_51_RoHS_L_6.pdf, Height="0.016\" (0.40mm)", Size / Dimension="0.039\" L x 0.020\" W (1.00mm x 0.50mm)"
R17 R19: library part RC0402FR-0710KL, "RES 18 OHM 1/16W 0402 SMD", Package / Case="0402 (1005 Metric)", Power (Watts)="0.063W, 1/16W", .Checked PCB=used, .Checked SCH=used, Category=Resistors, ComponentLink1Description=http://www.yageo.com/documents/recent/PYu-RC0402_51_RoHS_L_6.pdf, ComponentLink1URL=http://www.yageo.com/documents/recent/PYu-RC0402_51_RoHS_L_6.pdf, Height="0.016\" (0.40mm)", Size / Dimension="0.039\" L x 0.020\" W (1.00mm x 0.50mm)"
SP1: "for finger touch"
U1: library part MD0100N8-G
Y1: "Crystal or Oscillator", Manufacturer_Name=ABRACON, Mouser Part Number=815-ABM8G-24-18-D2Y, Arrow Part Number=ABM8G-24.000MHZ-18-D2Y-T, Arrow Price/Stock=https://www.arrow.com/en/products/abm8g-24.000mhz-18-d2y-t/abracon?region=nac, Datasheet Link=https://abracon.com/Resonators/ABM8G.pdf, Height=1mm, Manufacturer_Part_Number=ABM8G-24.000MHZ-18-D2Y-T, Mouser Price/Stock=https://www.mouser.co.uk/ProductDetail/ABRACON/ABM8G-24.000MHZ-18-D2Y-T?qs=3LVMET7lfiPTenlO89lQpg%3D%3D

## Via types
v1: diameter 0.35, hole 0.17, Top Layer to Bottom Layer, tented both sides, 251 vias

## Nets (pads, with @x,y where several pads share a name; then routed paths per layer and width w, separated by ;. In a path a pad name is that pad's centre, name@x,y a point inside that pad or via, vN(x,y) a via of type N, cw(c..) or ccw(c..) an arc to the next point about the centre after c; other vN are vias at no path point)
1V8_VDDI: C2.2 C5.1 IC1.31 IC4.31 | length 19.1
  Top Layer w0.17: IC4.31@44.325,29.65 44.325,30.28 44.465,30.42 44.55,30.42 v1(44.644,30.514)
  Top Layer w0.25: C5.1@41.05,18.875 41.104,18.821 41.478,18.821 42.113,18.186 42.113,17.921 42.232,17.802 ; v1(41.792,17.822) 41.811,17.802 42.232,17.802 ; IC1.31@42.9,17.75 42.875,17.775 42.26,17.775 42.232,17.802
  Bottom Layer w0.17: v1(41.792,17.822) 41.776,17.838 41.776,29.736 42.57,30.531 44.628,30.531 v1(44.644,30.514)
2V8: B2.5 C4.1 C11.1 C12.1 C14.2 C29.1 C36.2 C39.2 C41.2 C49.1 IC1.1 IC1.2 IC1.8 IC1.14 IC1.15 IC1.18 IC1.19 IC1.23 IC1.29 IC1.30 IC1.32 IC1.36 | length 24.8
  Top Layer w0.2: v1(42.24,15.24) 42.89,15.24 IC1.36@42.9,15.25
  Top Layer w0.25: C12.1@41.05,17.925 41.05,17.145 ; C11.1@41.05,19.85 C11.1@41.063,19.863 ; v1(41.072,16.51) 40.59,16.51 C4.1@40.5,16.6 40.505,16.6 41.05,17.145 ; v1(41.072,20.396) 41.061,20.385 41.061,19.883 41.072,19.872 C11.1@41.063,19.863 ; IC1.32@42.9,17.25 41.155,17.25 41.05,17.145 ; IC1.1@43.6,12.55 IC1.2@44.1,12.55 44.075,12.525 44.075,11.868 44.07,11.863 44.07,11.57 C14.2@43.875,11.375 43.896,11.354 43.907,11.364 44.414,11.364 v1(44.425,11.354) ; IC1.29@44.1,18.45 IC1.30@43.6,18.45 42.739,18.45 41.534,19.655 41.25,19.655 41.088,19.817 41.088,19.837 C11.1@41.063,19.863 ; v1(46.584,11.303) 47.103,11.303 C39.2@47.175,11.375 ; v1(46.609,19.71) 46.915,19.71 47.1,19.525 IC1.23@47.1,18.45 ; IC1.8@47.1,12.55 47.125,12.525 47.125,11.425 C39.2@47.175,11.375 ; IC1.15@48.8,15.25 IC1.14@48.8,14.75 48.825,14.725 49.486,14.725 49.78,14.725 49.975,14.53 49.975,14.525 49.997,14.503 50.022,14.529 v1(50.775,14.529) ; IC1.18@48.8,16.75 IC1.19@48.8,17.25 48.825,17.275 49.925,17.275 C36.2@49.95,17.3 49.973,17.323 v1(50.546,17.323) ; B2.5@50.25,8.95 50.2,8.9 49.025,8.9 C49.1@48.975,8.85 48.975,10.588 48.188,11.375 C39.2@47.175,11.375
5V: C33.2 C54.1 C55.1 C58.2 FB1.1 FB2.1 IC3.A6 IC3.F4 IC6.5 IC7.14 J2.2 J2.6 J3.1 | length 8.8
  Top Layer w0.15: IC3.F4@13.25,17.175 13.26,17.185 13.552,17.185 v1(13.564,17.196) ; IC3.A6@15.75,16.175 17,16.175 C55.1@17.125,16.3 17.125,17.219 17.122,17.221 17.122,17.297 17.097,17.272 v1(16.688,17.272)
  Top Layer w0.3: IC6.5@8.788,33.452 v1(9.22,33.452) ; v1(11.227,36.246) 11.932,36.246 IC7.14@11.99,36.188 ; v1(50.648,19.177) 50.648,19.773 C58.2@50.675,19.8 ; J3.1@52.12,21.3 J3.1@52.12,21.3 52.172,21.25 v1(52.172,20.828) ; FB1.1@54.45,10.725 54.438,10.737 54.438,12.338 C33.2@54.425,12.35 55.316,12.35 v1(55.321,12.344) ; v1(54.508,32.004) 54.508,32.739 FB2.1@54.523,32.753
5VLNA: C24.2 C25.2 FB6.2 IC2.3 | length 8.2
  Top Layer w0.4: IC2.3@24.985,18.825 26.547,18.825 27.2,19.478 FB6.2@27.2,23 27.175,22.975 25.025,22.975 C25.2@25,22.95
5VVGA: C26.2 C27.2 FB5.1 R6.1 R9.1 R10.1 R11.1 | length 12.5
  Top Layer w0.3: v1(33.274,18.923) R9.1@33.291,18.923
  Top Layer w0.4: FB5.1@28.8,23.025 28.812,23.013 30.987,23.013 C26.2@31,23 32.753,23 33.291,22.462 R6.1@33.291,19.837 R9.1@33.291,18.923 ; R11.1@33.164,14.808 33.176,14.821 v1(33.176,15.684) R10.1@33.189,15.697
  Int2 (Power) w0.3: v1(33.176,15.684) 33.176,18.825 v1(33.274,18.923)
+3V3: C1.2 C3.1 C6.1 C34.1 C35.1 C43.1 C56.1 IC3.A9 IC4.14 IC4.18 IC4.32 IC5.5 IC8.1 R28.1 | length 11.7
  Top Layer w0.2: C43.1@45.975,23.305 C43.1@45.975,23.3 46.15,23.475 v1(46.15,23.752) 46.15,23.9 46.325,24.075 IC4.14@46.325,24.65 ; IC4.18@48.075,25.9 48.092,25.883 48.101,25.891 48.556,25.891 v1(48.565,25.883) ; v1(50.14,26.746) 50.696,26.746 C3.1@50.7,26.75
  Top Layer w0.3: IC8.1@6.95,26.55 6.96,26.56 6.96,27.08 7.775,27.895 C6.1@7.775,27.9 7.887,27.788 v1(8.484,27.788) ; IC3.A9@15.75,14.658 IC3.A9@15.75,14.675 15.723,14.648 15.723,14.161 16.027,13.857 v1(16.027,13.843) 16.027,13.792 C56.1@16.535,13.284 ; v1(43.231,30.963) 43.787,30.963 C1.2@43.825,30.925 IC4.32@43.825,29.65 ; v1(43.586,23.241) 43.906,23.241 44.007,23.343 C35.1@44.05,23.3 ; R28.1@46.2,35.8 46.203,35.797 v1(46.203,35.204) ; v1(48.489,34.569) 49.132,34.569 C34.1@49.148,34.553 49.16,34.541 50.41,34.541 IC5.5@50.423,34.528
+5V: FB5.2 FB6.1 | length 1.6
  Top Layer w0.4: FB6.1@27.2,24.75 27.213,24.763 28.787,24.763 FB5.2@28.8,24.775
+HV: C50.1 C52.2 IC3.P6 J2.5 | length 9.2
  Top Layer w0.3: J2.5@1.625,13.57 2.83,14.775 5.075,14.775 5.525,15.225 5.525,15.825 5.9,16.2 C50.1@6.775,16.2 6.9,16.075 C52.2@8.2,16.075 8.3,16.175 IC3.P6@9.25,16.175
-HV: C51.1 C53.2 IC3.P9 J2.9 | length 12
  Top Layer w0.3: J2.9@1.625,8.49 2.835,9.7 5.825,9.7 6.4,10.275 6.4,11.075 7.625,12.3 C51.1@9.175,12.3 9.2,12.325 C53.2@9.2,13.575 9.2,14.625 IC3.P9@9.25,14.675
CS: IC8.2 J1.1 | length 7.7
  Top Layer w0.25: J1.1@4.3,23.175 7.656,23.175 8.407,23.927 8.407,25.654 8.161,25.9 IC8.2@6.95,25.9
DAC_G: C19.2 IC2.10 IC8.8 | length 26.4
  Top Layer w0.17: IC8.8@11.35,26.55 12.718,26.55 13.233,26.035 23.317,26.035 v1(23.876,25.476) ; C19.2@24.95,13.15 v1@24.95,13.73 ; v1(24.968,13.748) v1@24.95,13.73 ; IC2.10@24.985,14.345 24.95,14.31 v1@24.95,13.73
  Bottom Layer w0.17: v1(23.876,25.476) 23.876,23.698 24.968,22.606 v1(24.968,13.748)